# Altium PCB pcb.PcbDoc
Units mm, origin at the board's own origin, x right, y up, seen from the top; angles counter-clockwise.
Board outline 50.5 x 53 mm, 2 copper layers (Top Layer, Bottom Layer); 69 components, 74 nets, 264 pads, 156 vias.
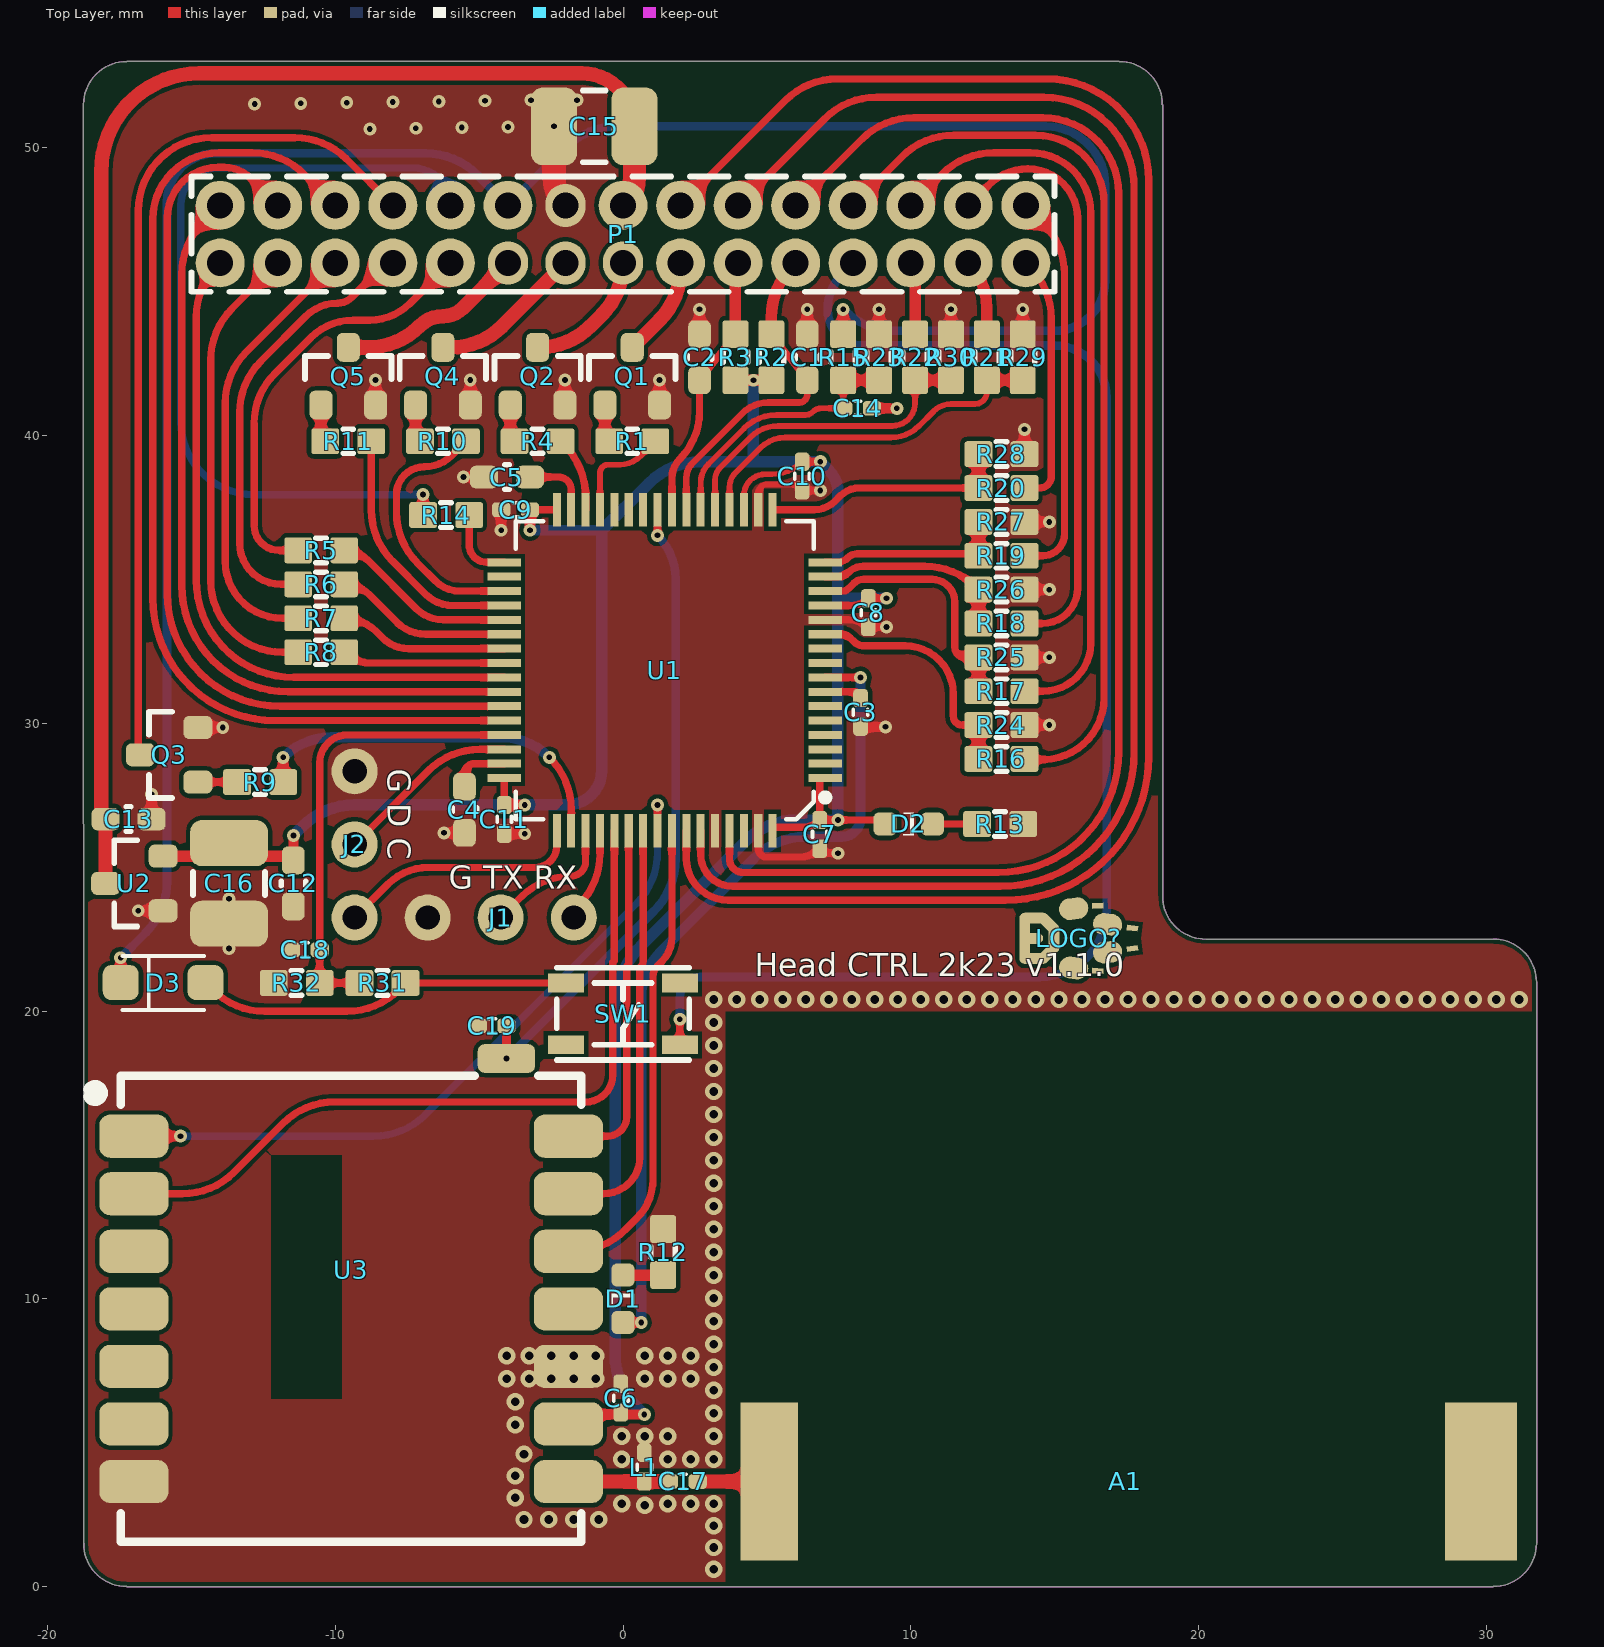
[diagram p0: Top Layer view]
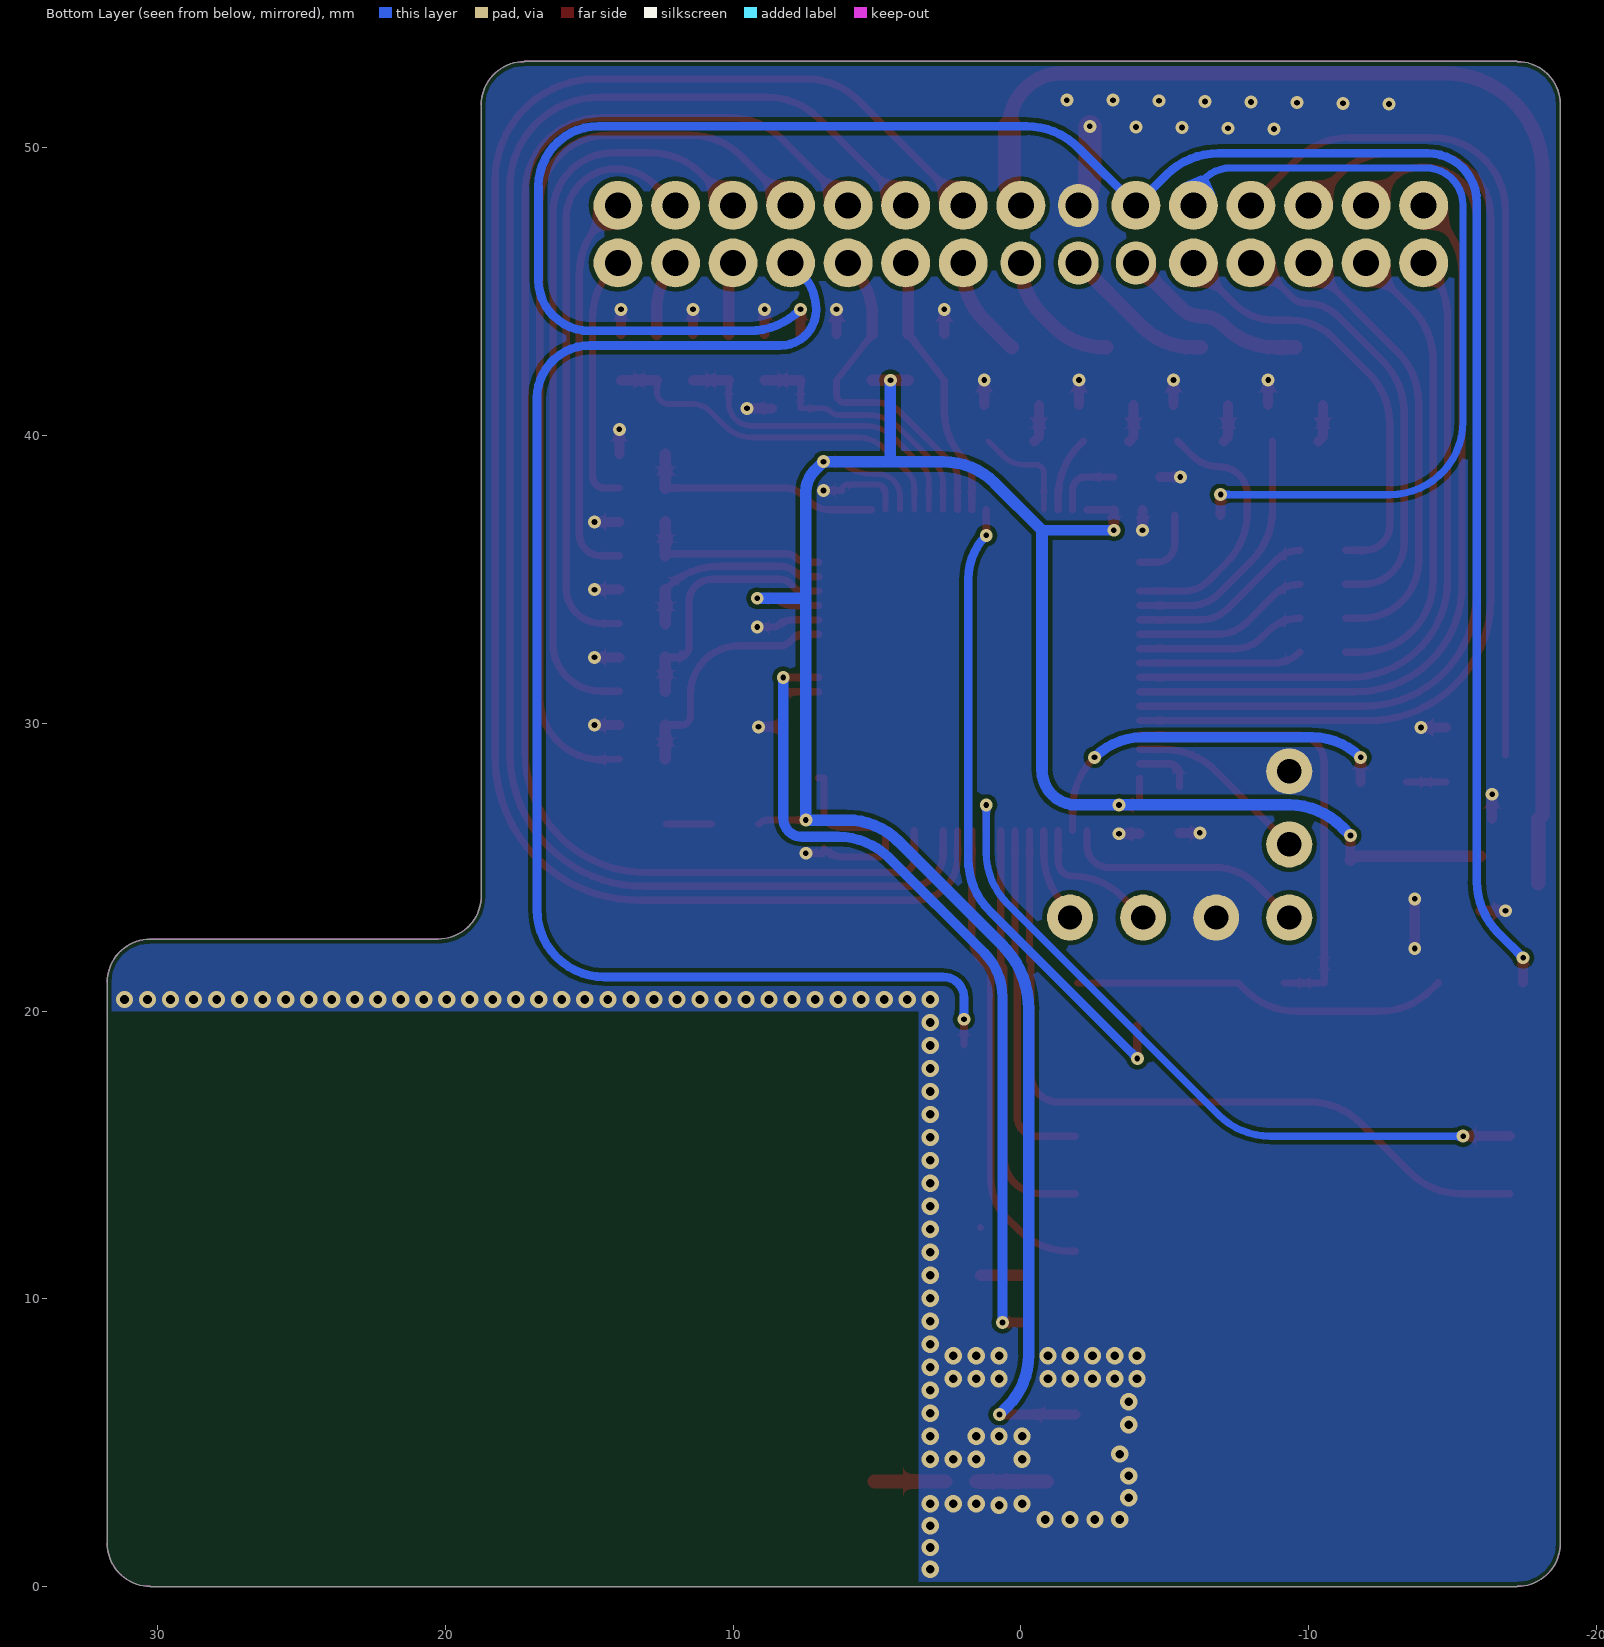
[diagram p1: Bottom Layer view, seen from below]
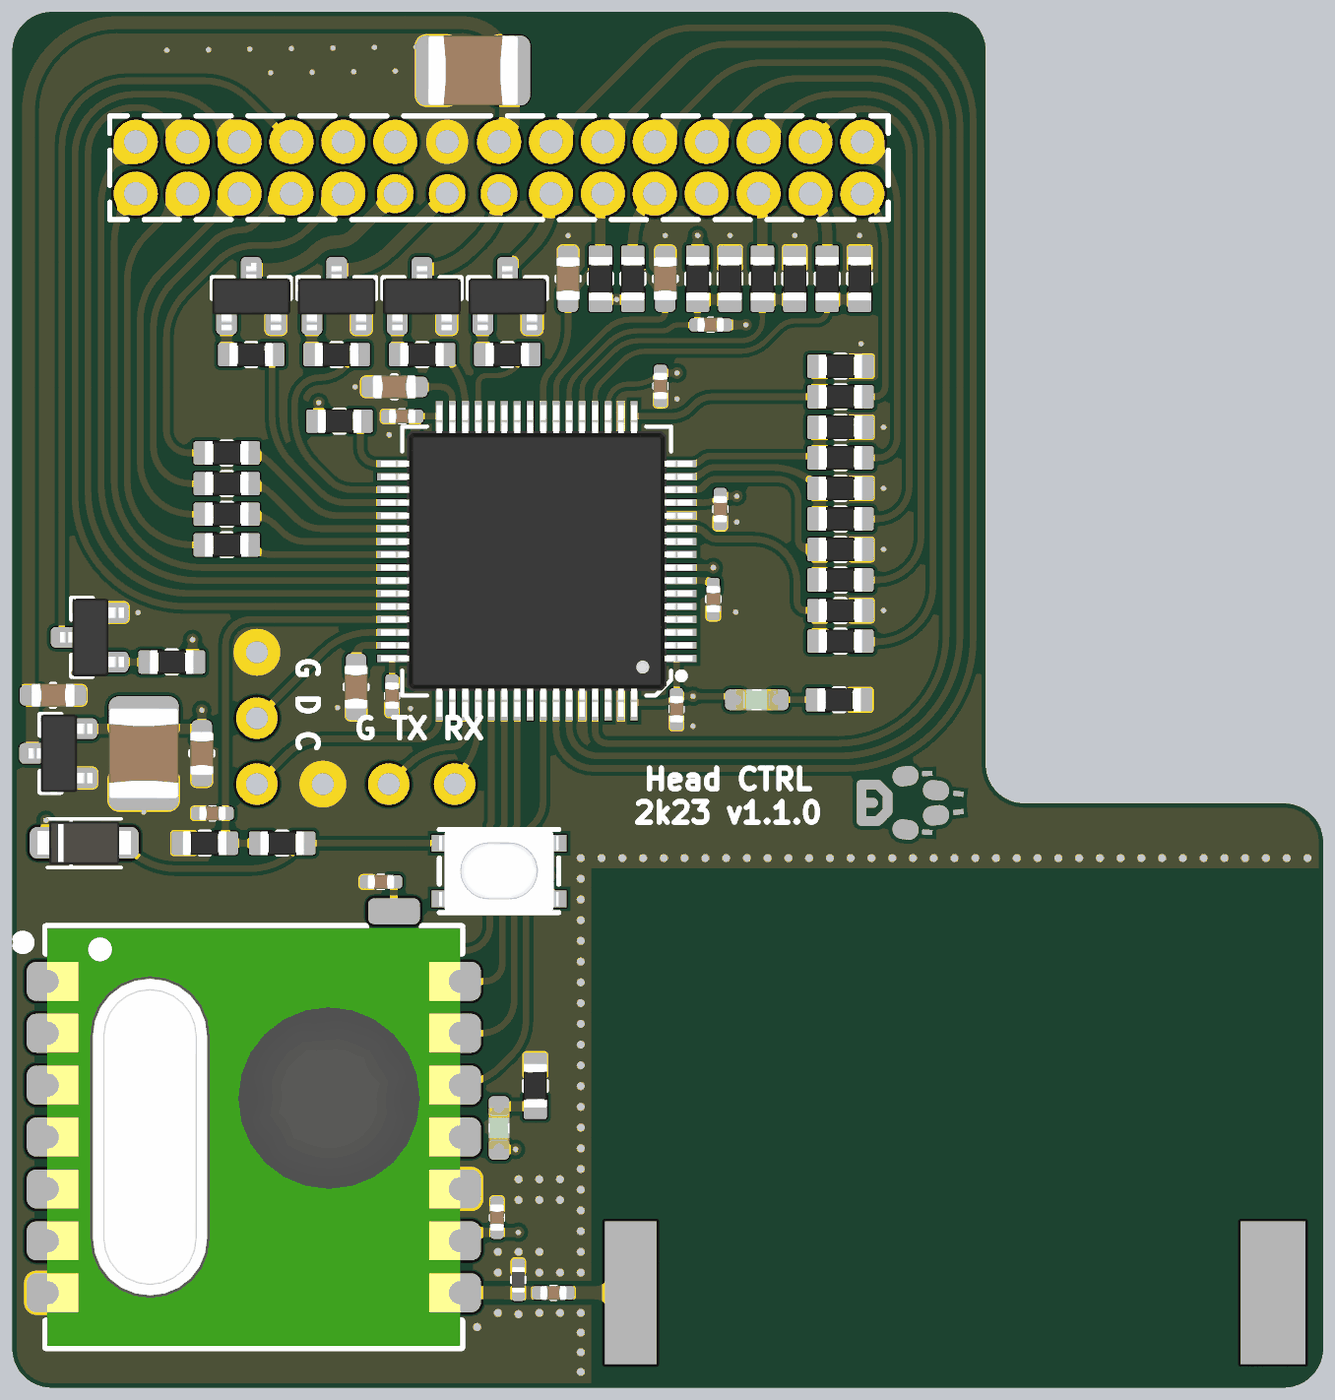
[diagram p2: 3D render of the assembled board from above, using the file's embedded part models]

## Layer stack, top to bottom
Top Solder: solder mask 0.0102, Solder Resist, Dk 3.5
Top Layer: signal copper 0.0356
Dielectric 1: dielectric 0.32, FR-4, Dk 4.8
Bottom Layer: signal copper 0.0356
Bottom Solder: solder mask 0.0102, Solder Resist, Dk 3.5

## Board outline
-18.75,1.5 -18.75,51.499 cw(c-17.25,51.499) -17.25,52.999 -17.25,53 17.25,53 17.25,52.999 cw(c17.25,51.499) 18.75,51.499 18.75,24 ccw(c20.25,24) 20.25,22.5 30.25,22.5 30.25,22.499 cw(c30.25,20.999) 31.75,20.999 31.751,20.999 31.751,1.5 31.75,1.5 cw(c30.25,1.5) 30.25,0.001 30.25,0 -17.25,0 -17.25,0.001 cw(c-17.25,1.5)

## Design rules (kind name [scope] priority, off if disabled: settings)
Clearance Clearance_1 [InNet('ANT')] p1: gap=0.203 ignorepadtopadclearanceinfootprint=FALSE except(0.7: Arc-Fill Arc-Poly Arc-Region Track-Fill Track-Poly Track-Region SMDPad-Fill SMDPad-Poly SMDPad-Region THPad-Fill THPad-Poly THPad-Region Via-Fill Via-Poly Via-Region Fill-Fill Fill-Poly Fill-Region Poly-Poly Poly-Region Region-Region)
Clearance [All] p2: gap=0.15 ignorepadtopadclearanceinfootprint=FALSE
MinimumSolderMaskSliver [All] p1 off: minsoldermaskwidth=0.254
PolygonConnect [All] p1: connectstyle=Direct reliefconductorwidth=0.254 reliefentries=4 polygonreliefangle="90 Angle" airgapwidth=0.254
RoutingVias [All] p1 off: holewidth=0.711 width=1.27 viastyle="Through Hole" minholewidth=0.711 minwidth=1.27 maxholewidth=0.711 maxwidth=1.27
SilkToSolderMaskClearance [IsPad] p1 off: minsilkscreentomaskgap=0.254 clearancetoexposedcopper=TRUE
SolderMaskExpansion [All] p1: expansion=0.102 istentingtop=FALSE
Width [All] p1: maxlimit=12.7 minlimit=0.051 preferedwidth=0.254
28 further rules are at their usual default settings.

## Components (designator, comment, footprint, x,y, rotation, side; value= is the part's Value field where it differs from the comment)
A1 "ANT 433MHZ" 0433AT62A0020 17.45,3.65 r0 top
C1 "100n" C0603 6.404,42.723 r270 top
C2 "100n" C0603 2.66,42.723 r270 top
C3 "100n" C0402 8.255,30.378 r90 top
C4 "2.2u" C0603 -5.51,26.993 r90 top
C5 "2.2u" C0603 -4.034,38.557 r0 top
C6 "100n" C0402 -0.076,6.545 r270 top
C7 "100n" C0402 6.837,26.137 r90 top
C8 "100n" C0402 8.525,33.845 r90 top
C9 "100n" C0402 -3.734,37.42 r0 top
C10 "100n" C0402 6.223,38.591 r90 top
C11 "100n" C0402 -4.125,26.661 r90 top
C12 "1u" C0603 -11.455,24.435 r90 top
C13 "1u" C0603 -17.183,26.67 r180 top
C14 "100n" C0402 8.152,40.945 r180 top
C15 "1u" C1210 -1,50.746 r0 top
C16 "10u" C1210 -13.691,24.435 r90 top
C17 "56pF" C0402 2.096,3.65 r180 top
C18 "100n" C0402 -11.041,22.123 r0 top
C19 "100n" C0402 -4.55,19.482 r0 top
D1 "GRN" LED-0603-GRN 0,10 r270 top
D2 "GRN" LED-0603-GRN 9.931,26.5 r180 top
D3 "DS1M" SOD-123FL -15.983,20.988 r180 top
J1 "UART" HDR-1X3_2.54 -4.25,23.25 r270 top
J2 "SWD" HDR-1X3_2.54 -9.33,25.79 r180 top
L1 "18nH" L0402 0.742,4.15 r90 top
LOGO? "LOGO" LOGO 13.962,22.528 r270 top
P1 "Header 15X2" HDR2X15-2mm 0,47 r180 top
Q1 "IRLML2502" SOT-23 0.321,42.063 r270 top
Q2 "IRLML2502" SOT-23 -2.969,42.063 r270 top
Q3 "IRLML2502" SOT-23 -15.773,28.905 r0 top
Q4 "IRLML2502" SOT-23 -6.258,42.063 r270 top
Q5 "IRLML2502" SOT-23 -9.548,42.063 r270 top
R1 "1k" R0603 0.321,39.802 r0 top
R2 "10k" R0603 5.156,42.723 r270 top
R3 "10k" R0603 3.908,42.723 r270 top
R4 "1k" R0603 -2.969,39.802 r0 top
R5 "10k" R0603 -10.49,36.01 r180 top
R6 "10k" R0603 -10.49,34.83 r180 top
R7 "10k" R0603 -10.49,33.649 r180 top
R8 "10k" R0603 -10.49,32.469 r180 top
R9 "1k" R0603 -12.611,27.955 r0 top
R10 "1k" R0603 -6.258,39.802 r0 top
R11 "1k" R0603 -9.548,39.802 r0 top
R12 "330" R0603 1.396,11.625 r270 top
R13 "1k" R0603 13.106,26.5 r180 top
R14 "1k" R0603 -6.147,37.236 r180 top
R15 "47k" R0603 7.652,42.723 r90 top
R16 "47k" R0603 13.152,28.761 r0 top
R17 "47k" R0603 13.152,31.115 r0 top
R18 "47k" R0603 13.152,33.468 r0 top
R19 "47k" R0603 13.152,35.822 r0 top
R20 "47k" R0603 13.152,38.176 r0 top
R21 "47k" R0603 12.645,42.723 r90 top
R22 "47k" R0603 10.148,42.723 r90 top
R23 "10k" R0603 8.9,42.723 r270 top
R24 "10k" R0603 13.152,29.938 r180 top
R25 "10k" R0603 13.152,32.291 r180 top
R26 "10k" R0603 13.152,34.645 r180 top
R27 "10k" R0603 13.152,36.999 r180 top
R28 "10k" R0603 13.152,39.353 r180 top
R29 "10k" R0603 13.893,42.723 r270 top
R30 "10k" R0603 11.397,42.723 r270 top
R31 "30k" R0603 -8.357,20.975 r0 top
R32 "22k" R0603 -11.341,20.975 r0 top
SW1 "PTS810SJS250" BTN_PTS810 0,19.9 r0 top
U1 "STM32F405RGT6" LQFP-64 1.45,31.845 r90 top
U2 "XC6206P332MR" SOT-23 -16.983,24.435 r0 top
U3 "RFM12B" RFM12B -9.45,9.65 r0 top

## Footprints (in the part's own frame and the unit in brackets; to place one, negate y for a bottom-side part, rotate by r counter-clockwise, add the part's x,y. Pads: shape width x height; smd on the part's side, far side on the other; paste and mask are expansions set on the pad)
0433AT62A0020 [mm]
  rect 2x5.5 smd: 1(-12.375,0)
  rect 2.5x5.5 smd: 2(12.375,0)
  body extent -12.27,-2.5 12.73,2.5, height 1.2
BTN_PTS810 [mm]
  rect 1.25x0.65 smd mask+0.05: 1(-1.975,1.075) 2(1.975,1.075) 3(-1.975,-1.075) 4(1.975,-1.075)
  silkscreen extent -2.3,-1.6 2.3,1.6, body extent -2.3,-1.6 2.3,1.6, height 2.5
C0402 [mm] "Chip Capacitor Body"
  rrect50% 0.635x0.508 smd mask+0.05: 1(-0.5,0) 2(0.5,0)
  silkscreen extent -0.1,-0.25 0.1,0.25, body extent -0.52,-0.27 0.53,0.28, height 0.55
C0603 [mil] "Chip Capacitor"
  rrect50% 38x31 smd mask+1.97: 1(-31.5,0) 2(31.5,0)
  silkscreen extent -3,-17 3,17, body extent -33,-18 33,18, height 35
C1210 [mm] "Chip Capacitor"
  rrect50% 1.6x2.7 smd mask+0.05: 1(-1.4,0) 2(1.4,0)
  silkscreen extent -0.4,-1.25 0.4,1.25, body extent -1.75,-1.35 1.75,1.35, height 1.8
HDR2X15-2mm [mm] "Connector; Header; 30x2 Position"
  round 1.7 hole 0.9: 1(-14,-1) 2(-14,1) 3(-12,-1) 4(-12,1) 5(-10,-1) 6(-10,1) 7(-8,-1) 8(-8,1) 9(-6,-1) 10(-6,1) 11(-4,-1) 12(-4,1) 13(-2,-1) 14(-2,1) 15(0,-1) 19(4,-1) 21(6,-1) 22(6,1) 23(8,-1) 24(8,1) 25(10,-1) 26(10,1) 27(12,-1) 28(12,1) 29(14,-1) 30(14,1)
  oval 1.4x1.5 hole 0.9: 16(0,1) 17(2,-1) 18(2,1) 20(4,1)
  silkscreen extent -15,-2 15,2
HDR-1X3_2.54 [mm]
  round 1.6 hole 0.85: 1(0,2.54) 2(0,0) 3(0,-2.54)
L0402 [mm] "Chip Inductor"
  rrect50% 0.635x0.508 smd mask+0.05: 1(-0.5,0) 2(0.5,0)
  silkscreen extent -0.1,-0.25 0.1,0.25, body extent -0.5,-0.25 0.5,0.25, height 0.5
LED-0603-GRN [mm]
  rrect50% 0.8x0.8 smd mask+0.05: 1(0.825,0) 2(-0.825,0)
  silkscreen extent -0.18,-0.4 0.2,0.4, body extent -0.8,-0.4 0.8,0.4, height 0.6
LOGO [mil]
  rect 15.75x7.87 smd rot 93 mask+4: ""(-44.55,100)
  oval 30x40 smd rot 8 mask+4: ""(-40.55,67)
  oval 15x39.5 smd mask+4: ""(-27.5,12.5) ""(27.5,12.5)
  oval 15x36.21 smd rot 135 mask+4: ""(-20,32.5)
  oval 30x40 smd rot 173 mask+4: ""(-18.99,113.27)
  rect 15.75x7.87 smd rot 83 mask+4: ""(-13.91,147.15)
  oval 39.5x15 smd mask+4: ""(0,40)
  oval 15x32.5 smd mask+4: ""(0,9)
  oval 70x15 smd mask+4: ""(0,0)
  rect 15.75x7.87 smd rot 97 mask+4: ""(13.91,147.15)
  oval 30x40 smd rot 7 mask+4: ""(18.99,113.27)
  oval 15x36.21 smd rot 45 mask+4: ""(20,32.5)
  oval 30x40 smd rot 172 mask+4: ""(40.55,67)
  rect 15.75x7.87 smd rot 87 mask+4: ""(44.55,100)
LQFP-64 [mil]
  rect 11x46 smd mask+0.98: 1(-147.64,-219.5) 2(-127.95,-219.5) 3(-108.27,-219.5) 4(-88.58,-219.5) 5(-68.9,-219.5) 6(-49.21,-219.5) 7(-29.53,-219.5) 8(-9.84,-219.5) 9(9.84,-219.5) 10(29.53,-219.5) 11(49.21,-219.5) 12(68.9,-219.5) 13(88.58,-219.5) 14(108.27,-219.5) 15(127.95,-219.5) 16(147.64,-219.5) 33(147.64,219.5) 34(127.95,219.5) 35(108.27,219.5) 36(88.58,219.5) 37(68.9,219.5) 38(49.21,219.5) 39(29.53,219.5) 40(9.84,219.5) 41(-9.84,219.5) 42(-29.53,219.5) 43(-49.21,219.5) 44(-68.9,219.5) 45(-88.58,219.5) 46(-108.27,219.5) 47(-127.95,219.5) 48(-147.64,219.5)
  rect 46x11 smd mask+0.98: 17(219.5,-147.64) 18(219.5,-127.95) 19(219.5,-108.27) 20(219.5,-88.58) 21(219.5,-68.9) 22(219.5,-49.21) 23(219.5,-29.53) 24(219.5,-9.84) 25(219.5,9.84) 26(219.5,29.53) 27(219.5,49.21) 28(219.5,68.9) 29(219.5,88.58) 30(219.5,108.27) 31(219.5,127.95) 32(219.5,147.64) 49(-219.5,147.64) 50(-219.5,127.95) 51(-219.5,108.27) 52(-219.5,88.58) 53(-219.5,68.9) 54(-219.5,49.21) 55(-219.5,29.53) 56(-219.5,9.84) 57(-219.5,-9.84) 58(-219.5,-29.53) 59(-219.5,-49.21) 60(-219.5,-68.9) 61(-219.5,-88.58) 62(-219.5,-108.27) 63(-219.5,-127.95) 64(-219.5,-147.64)
  silkscreen extent -204,-224 204,204, body extent -236,-236 236,236, height 59
R0603 [mil] "Chip Resistor; Body 1.6 x 0.8 mm (LxW typ)"
  rrect20% 38x35.43 smd mask+1.97: 1(-31.5,0) 2(31.5,0)
  silkscreen extent -7,-17 7,17, body extent -33,-18 33,18, height 22
RFM12B [mm]
  rrect50% 2.4x1.5 smd: 1(-7.55,6) 2(-7.55,4) 3(-7.55,2) 4(-7.55,0) 5(-7.55,-2) 6(-7.55,-4) 7(-7.55,-6) 8(7.55,-6) 9(7.55,-4) 10(7.55,-2) 11(7.55,0) 12(7.55,2) 13(7.55,4) 14(7.55,6)
  rrect50% 2x1 smd: 15(5.4,8.7)
  Top Layer pour cut-out: -2.8,-3.15 -0.3,-3.15 -0.3,5.35 -2.8,5.35
  silkscreen extent -9.05,-8.1 8,8.1, body extent -7.96,-8.05 7.96,8.05, height 4.12
SOD-123FL [mm]
  rrect50% 1.25x1.22 smd: 1(-1.475,0) 2(1.475,0)
  silkscreen extent -1.43,-0.92 1.43,0.95, body extent -1.8,-0.83 1.8,0.82, height 0.95
SOT-23 [mm]
  rrect50% 1x0.8 smd mask+0.05: 1(1,-0.95) 2(1,0.95) 3(-1,0)
  silkscreen extent -0.7,-1.5 0.1,1.5, body extent -1.27,-1.5 1.33,1.5, height 1.1

## Part data
A1: library part Component_2, "433 MHz ISM Antenna", P/N=0433AT62A0020
C1 C2 C3 C4 C5 C6 C7 C8 C9 C10 C11 C12 C13 C14 C15 C16 C18 C19: library part Cap
C17: library part CAP
D1 D2: library part LED-0603-GREEN, "LED 0603 GRN", LCSC part number=C434420, P/N=SZYY0603G
D3: library part US1M-13-F
J1 J2: library part "Header 3"
L1: library part BLM18AG601SN1D, LCSC part number=C92615, P/N=CBG100505U600T
P1: "Header, 15-Pin, Dual row"
Q1 Q2 Q3 Q4 Q5: "MOSFET N-CH 20V 4.2A SOT-23-3"
R1 R2 R3 R4 R5 R6 R7 R8 R9 R10 R11 R12 R13 R14 R15 R16 R17 R18 R19 R20 R21 R22 R23 R24 R25 R26 R27 R28 R29 R30 R31 R32: library part Res1
SW1: library part Component_1, LCSC part number=C221896, P/N=PTS810SJK250SMTRLFS
U1: "MCU STM32F405RGT6", P/N=STM32F405RGT6
U2: library part Component_4_1, LCSC part number=C347376, P/N=XC6206P332MR
U3: library part Component_1_1, P/N=RFM12B

## Via types
v1: diameter 0.6, hole 0.3, Top Layer to Bottom Layer, tented both sides, 95 vias
v2: diameter 0.45, hole 0.2, Top Layer to Bottom Layer, tented both sides, 61 vias

## Nets (pads, with @x,y where several pads share a name; then routed paths per layer and width w, separated by ;. In a path a pad name is that pad's centre, name@x,y a point inside that pad or via, vN(x,y) a via of type N, cw(c..) or ccw(c..) an arc to the next point about the centre after c; other vN are vias at no path point)
3V3: C6.2 C7.2 C8.2 C9.2 C10.2 C11.2 C12.2 C16.2 D2.1 R2.2 R3.2 U1.1 U1.13 U1.19 U1.32 U1.48 U1.64 U2.2 U3.9 | length 97.8
  Top Layer w0.2: U1.19 4.2,37.906 cw(c4.953,37.906) 4.953,38.659 5.181,38.659 ccw(c5.181,40.133) C10.2
  Top Layer w0.25: C11.2 U1.48 ; C9.2 U1.32 ; U1.64@5.2,26.387 6.233,26.387 ccw(c6.233,27.24) C7.2 ; C10.2 v2(6.858,39.091) ; U1.1 6.837,28.095 C7.2 ; U1.13 7.921,34.095 ccw(c7.921,34.948) C8.2 v2(9.16,34.345) ; D2.1 ccw(c8.777,26.17) 8.777,26.637 v2(7.472,26.637) C7.2
  Top Layer w0.35: C12.2 v2(-11.455,26.098) ; C11.2 v2(-3.414,27.161) ; v2(-3.234,36.709) C9.2 ; U3.9@-1.9,5.98 v2(0.742,5.98)
  Top Layer w0.4: U2.2 -11.817,25.385 cw(c-11.817,24.873) C12.2 ; R3.2 v2(4.532,41.923) R2.2
  Bottom Layer w0.35: v2(-3.234,36.709) -0.737,36.709
  Bottom Layer w0.4: v2(-11.455,26.098) -11.137,26.417 cw(c-9.341,24.621) -9.341,27.161 v2(-3.414,27.161) -1.947,27.161 ccw(c-1.947,28.372) -0.737,28.372 -0.737,36.709 0.901,38.347 cw(c2.697,36.551) 2.697,39.091 4.532,39.091 ; v2(0.742,5.98) 0.47,6.252 cw(c2.266,8.048) -0.274,8.048 -0.274,20.07 cw(c2.873,20.07) 0.684,22.332 4.245,25.893 cw(c6.041,24.097) 6.041,26.637 v2(7.472,26.637) 7.472,34.345 ; v2(4.532,41.923) 4.532,39.091 ; v2(9.16,34.345) 7.472,34.345 ; 4.532,39.091 v2(6.858,39.091) 7.165,38.784 cw(c6.424,38.043) 7.472,38.043 7.472,34.345
5V: C13.2 C15.2 P1.15 U2.3 | length 49.7
  Top Layer w0.254: P1.15@0.055,47.526 P1.15@0.055,48
  Top Layer w0.5: U2.3 C13.2 -18.136,26.822 -18.136,49.173 cw(c-14.718,49.173) -14.718,52.59 -1.444,52.59 cw(c-1.444,50.746) C15.2
  Top Layer w0.8: P1.15 ccw(c-0.966,48.966) 0.055,48.058 ccw(c-0.966,48.966) 0.4,48.966 C15.2
_FAN0: P1.18 Q4.3 | length 5.4
  Top Layer w0.5: Q4.3 -5.989,43.063 ccw(c-5.989,45.603) -4.193,43.807 P1.18
_FAN1: P1.20 Q5.3 | length 6.6
  Top Layer w0.5: Q5.3 -8.865,43.063 ccw(c-8.865,45.603) -7.069,43.807 cw(c-6.253,42.991) -6.253,44.145 ccw(c-6.253,45.107) -5.573,44.427 P1.20
_LED0: P1.14 Q1.3 | length 3.5
  Top Layer w0.5: Q1.3 1.256,43.998 ccw(c-0.54,45.794) 2,45.794 P1.14
_LED1: P1.16 Q2.3 | length 4.6
  Top Layer w0.5: Q2.3 -2.921,43.063 ccw(c-2.921,45.603) -1.125,43.807 -0.744,44.189 ccw(c-2.54,45.985) 0,45.985 P1.16
_LED2: P1.23 Q3.3 | length 30.1
  Top Layer w0.254: Q3.3@-16.844,28.905 -16.844,47.815 cw(c-14.304,47.815) -14.304,50.355 -11.407,50.355 cw(c-11.407,47.815) -9.611,49.611 P1.23
_SAIN0: P1.7 R16.2 | length 32.1
  Top Layer w0.254: P1.7 9.694,49.694 cw(c11.491,47.898) 11.491,50.438 14.338,50.438 cw(c14.338,48.057) 16.719,48.057 16.719,30.881 cw(c14.572,30.881) 14.381,28.742 R16.2
_SAIN1: P1.5 R17.2 | length 26.3
  Top Layer w0.254: P1.5 11.085,49.085 cw(c12.881,47.289) 12.881,49.829 14.158,49.829 cw(c14.158,47.727) 16.261,47.727 16.261,32.788 cw(c14.587,32.788) 14.587,31.115 R17.2
_SAIN2: P1.3 R18.2 | length 20.6
  Top Layer w0.254: P1.3 12.703,48.703 cw(c14.071,47.335) 14.071,49.27 cw(c14.071,47.54) 15.802,47.54 15.802,34.7 cw(c14.57,34.7) 14.57,33.468 R18.2
_SAIN3: P1.1 R19.2 | length 13.7
  Top Layer w0.254: R19.2 14.583,35.822 ccw(c14.583,36.581) 15.343,36.581 15.343,45.605 ccw(c12.803,45.605) 14.599,47.401 P1.1
_SAIN4: P1.2 R20.2 | length 8.8
  Top Layer w0.254: R20.2 14.48,38.176 ccw(c14.48,38.58) 14.884,38.58 14.884,44.069 ccw(c12.356,44.069) 14.144,45.856 P1.2
_SAIN5: P1.4 R21.2 | length 3.1
  Top Layer w0.254: P1.4@12,45.516 P1.4
  Top Layer w0.4: P1.4 cw(c10.444,44.444) 12.645,44.444 R21.2
_SAIN6: P1.6 R22.2 | length 2.7
  Top Layer w0.254: P1.6@10,45.853 P1.6
  Top Layer w0.4: P1.6 cw(c9.642,45.642) 10.148,45.642 R22.2
ADC0: R16.1 R24.2 U1.11 | length 8.5
  Top Layer w0.254: U1.11 7.59,33.095 cw(c7.59,32.656) 7.901,32.966 8.033,32.835 ccw(c8.382,33.184) 8.382,32.69 9.804,32.69 cw(c9.804,31.013) 11.481,31.013 11.481,30.251 ccw(c11.795,30.251) 11.795,29.938 R24.2
  Top Layer w0.4: R16.1 R24.2
ADC1: R17.1 R25.2 U1.14 | length 8.9
  Top Layer w0.254: U1.14 7.625,34.595 ccw(c7.625,34.901) 7.841,34.684 8.017,34.861 cw(c8.357,34.522) 8.357,35.001 10.744,35.001 cw(c10.744,34.214) 11.532,34.214 11.532,32.64 ccw(c11.88,32.64) 11.88,32.291 R25.2
  Top Layer w0.4: R17.1 R25.2
ADC2: R18.1 R26.2 U1.15 | length 6.8
  Top Layer w0.254: U1.15 7.461,35.095 ccw(c7.461,35.642) 7.849,35.255 cw(c8.339,34.765) 8.339,35.458 10.487,35.458 cw(c10.487,32.918) 12.283,34.714 R26.2
  Top Layer w0.4: R18.1 R26.2
ADC3: R19.1 R27.2 U1.16 | length 6.6
  Top Layer w0.254: U1.16 7.417,35.595 ccw(c7.417,36.17) 7.823,35.763 cw(c8.13,35.457) 8.13,35.89 R19.1@12.352,35.89
  Top Layer w0.4: R19.1 12.352,35.89 R27.2
ADC4: R20.1 R28.2 U1.17 | length 8.6
  Top Layer w0.254: U1.17 6.644,37.42 ccw(c6.644,38.441) 7.366,37.719 7.553,37.906 cw(c8.204,37.255) 8.204,38.176 R20.1
  Top Layer w0.4: R20.1 R28.2
ADC5: R21.1 R29.2 U1.20 | length 12.8
  Top Layer w0.2: U1.20 3.7,38.199 cw(c4.422,38.199) 3.912,38.71 4.772,39.57 cw(c5.639,38.702) 5.639,39.929 9.306,39.929 ccw(c9.306,41.316) 10.287,40.335 10.798,40.846 cw(c11.405,40.239) 11.405,41.097 12.232,41.097 ccw(c12.232,41.51) 12.645,41.51 R21.1
  Top Layer w0.35: R21.1 R29.2
ADC6: R22.1 R30.2 U1.21 | length 11.3
  Top Layer w0.2: U1.21 3.2,38.457 cw(c3.808,38.457) 3.378,38.887 4.431,39.94 cw(c5.385,38.986) 5.385,40.335 9.355,40.335 ccw(c9.355,41.129) 10.148,41.129 R22.1
  Top Layer w0.35: R22.1 R30.2
ADC7: C14.2 R15.1 R23.2 U1.22 | length 9.3
  Top Layer w0.2: U1.22 2.7,38.358 cw(c3.628,38.358) 2.972,39.014 4.207,40.249 cw(c5.334,39.122) 5.334,40.716 6.331,40.716 ccw(c6.331,41.106) 6.607,40.831 cw(c6.883,40.555) 6.883,40.945 C14.2 R15.1
  Top Layer w0.35: R15.1 R23.2
ADC10: C19.2 U1.25 U3.15 | length 22.7
  Top Layer w0.25: v2(1.2,36.531) U1.25
  Top Layer w0.3: v2(-4.05,18.35) C19.2
  Bottom Layer w0.3: v2(-4.05,18.35) 1.085,23.485 ccw(c-0.711,25.281) 1.829,25.281 1.829,35.013 ccw(c-0.318,35.013) v2(1.2,36.531)
BTN_ON_SNS: C18.2 R31.1 R32.2 U1.45 | length 16
  Top Layer w0.254: R31.1 R32.2 C18.2 -10.541,28.626 cw(c-9.572,28.626) -10.129,29.419 cw(c-9.572,28.626) -9.572,29.595 U1.45
BTN_RTN: D3.2 P1.19 R15.2 | length 78.6
  Top Layer w0.35: D3.2 v2(-17.458,21.851) ; R15.2 v2(7.652,44.386)
  Bottom Layer w0.3: v2(-17.458,21.851) -16.594,22.716 ccw(c-18.39,24.512) -15.85,24.512 -15.85,48.108 cw(c-14.148,48.108) -14.148,49.809 -6.862,49.809 cw(c-6.862,47.269) -5.065,49.065 P1.19 -1.995,50.005 cw(c-0.199,48.209) -0.199,50.749 14.681,50.749 cw(c14.681,48.666) 16.764,48.666 16.764,45.415 cw(c14.986,45.415) 14.986,43.637 9.454,43.637 cw(c9.454,46.177) 7.658,44.381 v2(7.652,44.386)
C\S\: U1.54 U3.14 | length 12.4
  Top Layer w0.254: U3.14 -0.545,15.65 ccw(c-0.545,16.322) 0.127,16.322 0.127,21.508 cw(c0.253,21.508) 0.164,21.597 ccw(c0.076,21.685) 0.2,21.685 U1.54
FAN0: R10.2 U1.35 | length 9.2
  Top Layer w0.254: R10.2 -5.95,39.31 cw(c-6.909,40.269) -6.909,38.913 ccw(c-6.909,37.948) -7.874,37.948 -7.874,37.349 ccw(c-5.334,37.349) -7.13,35.553 -6.528,34.95 ccw(c-5.669,35.809) -5.669,34.595 U1.35
FAN1: R11.2 U1.36 | length 8.8
  Top Layer w0.254: R11.2 -8.748,37.423 ccw(c-6.208,37.423) -8.004,35.627 -6.864,34.487 ccw(c-5.917,35.434) -5.917,34.095 U1.36
GND: C1.1 C2.1 C3.1 C4.1 C5.1 C6.1 C7.1 C8.1 C9.1 C10.1 C11.1 C12.1 C13.1 C14.1 C15.1 C16.1 C18.1 C19.1 J1.3 J2.3 L1.2 P1.17 Q1.2 Q2.2 Q3.2 Q4.2 Q5.2 R12.1 R13.1 R23.1 R24.1 R25.1 R26.1 R27.1 R28.1 R29.1 R30.1 R32.1 U1.12 U1.18 U1.60 U1.63 U2.1 U3.7 U3.10 | length 32.7
  Top Layer w0.2: U1.18 4.7,37.999 cw(c5.004,37.999) 5.004,38.303 6.01,38.303 cw(c6.01,38.091) C10.1
  Top Layer w0.25: U1.63 4.7,25.643 ccw(c4.994,25.643) 4.994,25.349 6.143,25.349 ccw(c6.143,26.33) C7.1 ; C10.1 v2(6.858,38.091) ; C7.1@6.837,25.484 v2(7.472,25.484) ; U1.12 7.921,33.595 cw(c7.921,32.741) C8.1 v2(9.16,33.345)
  Top Layer w0.35: v2(-16.847,23.485) U2.1 ; C13.1 v2(-16.383,27.534) ; Q3.2 v2(-13.91,29.855) ; v2(-13.691,22.171) C16.1 v2(-13.691,23.898) ; Q5.2 v2(-8.598,41.927) ; v2(-6.221,26.193) C4.1 ; v2(-5.545,38.557) C5.1 ; Q4.2 v2(-5.308,41.927) ; v2(-4.234,36.709) C9.1 ; C11.1 v2(-3.414,26.161) ; Q2.2 v2(-2.019,41.927) ; Q1.2 v2(1.271,41.927) ; C2.1 v2(2.66,44.386) ; C1.1 v2(6.404,44.386) ; C3.1 v2(9.119,29.878) ; C14.1 v2(9.516,40.945) ; R23.1 v2(8.9,44.386) ; R30.1 v2(11.397,44.386) ; R29.1 v2(13.893,44.386) ; R24.1 v2(14.816,29.938) ; R25.1 v2(14.816,32.291) ; R26.1 v2(14.816,34.645) ; R27.1 v2(14.816,36.999) ; R28.1 v2(13.953,40.216)
  Top Layer w0.8: v2(-2.4,50.746) -2.4,48.966 ccw(c-1.034,48.966) P1.17
  other v1: 3.15,0.6 3.15,1.358 3.15,2.115 -3.442,2.328 -2.576,2.328 -1.71,2.328 -0.843,2.328 0.754,2.822 -0.045,2.873 1.553,2.873 2.351,2.873 3.15,2.873 -3.747,3.086 -3.747,3.844 -0.045,4.427 1.553,4.427 2.351,4.427 3.15,4.427 -3.442,4.601 -0.045,5.226 0.754,5.226 1.553,5.226 3.15,5.226 -3.747,5.626 3.15,6.024 -3.747,6.424 3.15,6.823 -4.038,7.223 -3.265,7.223 -2.491,7.223 -1.718,7.223 -0.945,7.223 0.754,7.223 1.553,7.223 2.351,7.223 3.15,7.622 -4.038,8.022 -3.265,8.022 -2.491,8.022 -1.718,8.022 -0.945,8.022 0.754,8.022 1.553,8.022 2.351,8.022 3.15,8.42 3.15,9.219 3.15,10.017 3.15,10.816 3.15,11.615 3.15,12.413 3.15,13.212 3.15,14.011 3.15,14.809 3.15,15.608 3.15,16.407 3.15,17.205 3.15,18.004 3.15,18.803 3.15,19.601 3.15,20.4 3.95,20.4 4.75,20.4 5.55,20.4 6.35,20.4 7.15,20.4 7.95,20.4 8.75,20.4 9.55,20.4 10.35,20.4 11.15,20.4 11.95,20.4 12.75,20.4 13.55,20.4 14.35,20.4 15.15,20.4 15.95,20.4 16.75,20.4 17.55,20.4 18.35,20.4 19.15,20.4 19.95,20.4 20.75,20.4 21.55,20.4 22.35,20.4 23.15,20.4 23.95,20.4 24.75,20.4 25.55,20.4 26.35,20.4 27.15,20.4 27.95,20.4 28.75,20.4 29.55,20.4 30.35,20.4 31.15,20.4
  other v2: -8.8,50.657 -7.2,50.679 -5.6,50.702 -4,50.724 -12.8,51.524 -11.2,51.546 -9.6,51.568 -8,51.591 -6.4,51.613 -4.8,51.635 -3.2,51.657 -1.6,51.657
I\R\Q\: U1.53 U3.2 | length 26.8
  Top Layer w0.254: U3.2 -15.317,13.65 ccw(c-15.317,16.19) -13.521,14.394 -11.818,16.096 cw(c-10.022,14.3) -10.022,16.84 -1.295,16.84 ccw(c-1.295,17.78) -0.356,17.78 -0.356,21.692 -0.3,21.747 U1.53
LED0: R1.2 U1.29 | length 3.7
  Top Layer w0.2: U1.29 -0.8,38.697 cw(c-0.508,38.697) -0.508,38.989 -0.1,38.989 ccw(c-0.1,39.975) 0.597,39.278 R1.2
LED1: R4.2 U1.30 | length 2.6
  Top Layer w0.254: R4.2 -2.044,39.677 cw(c-3.84,37.881) -1.3,37.881 U1.30
LED2: R9.2 U1.50 | length 13.2
  Top Layer w0.25: v2(-2.562,28.819) -2.544,28.801 cw(c-4.34,27.005) -1.8,27.005 U1.50
  Top Layer w0.35: R9.2 v2(-11.811,28.819)
  Bottom Layer w0.35: v2(-11.811,28.819) cw(c-10.131,27.139) -10.131,29.515 -4.242,29.515 cw(c-4.242,27.139) v2(-2.562,28.819)
LED_IND: D1.1 U1.8 | length 28.7
  Top Layer w0.254: U1.8 v2(8.255,31.595)
  Top Layer w0.35: D1.1 v2(0.635,9.175)
  Bottom Layer w0.35: v2(0.635,9.175) 0.635,20.475 cw(c2.837,20.475) 1.28,22.032 4.56,25.312 cw(c6.356,23.516) 6.356,26.056 7.607,26.056 ccw(c7.607,26.704) 8.255,26.704 v2(8.255,31.595)
MISO: U1.56 U3.1 | length 25.2
  Top Layer w0.25: U1.56 v2(1.2,27.159)
  Top Layer w0.35: U3.1 v2(-15.374,15.65)
  Bottom Layer w0.25: v2(-15.374,15.65) -8.669,15.65 ccw(c-8.669,18.19) -6.873,16.394 0.456,23.722 ccw(c-1.34,25.519) 1.2,25.519 v2(1.2,27.159)
MOSI: U1.57 U3.12 | length 16.6
  Top Layer w0.254: U3.12 -1.721,11.65 ccw(c-1.721,14.19) 0.075,12.394 0.483,12.802 ccw(c-0.866,14.151) 1.041,14.151 1.041,21.209 cw(c1.532,21.209) 1.185,21.556 1.346,21.717 ccw(c0.492,22.571) 1.7,22.571 U1.57
NetA1_1: A1.1 C17.1 | length 2.5
  Top Layer w0.254: C17.1 C17.1@2.621,3.65
  Top Layer w0.5: C17.1@2.621,3.65 A1.1
NetC4_2: C4.2 U1.47 | length 2
  Top Layer w0.25: C4.2 -5.51,28.254 cw(c-5.169,28.254) -5.169,28.595 U1.47
NetC5_2: C5.2 U1.31 | length 2.4
  Top Layer w0.25: C5.2 -2.235,38.557 cw(c-2.235,38.122) -1.8,38.122 U1.31
NetC17_2: C17.2 L1.1 U3.8 | length 2.5
  Top Layer w0.5: U3.8@-0.908,3.65 C17.2@1.546,3.65
NetD1_2: D1.2 R12.2 | length 1.4
  Top Layer w0.4: D1.2 R12.2
NetD2_2: D2.2 R13.2 | length 1.5
  Top Layer w0.25: D2.2 R13.2
NetD3_1: D3.1 R31.2 SW1.1 | length 13.1
  Top Layer w0.254: D3.1 -14.254,20.734 ccw(c-12.458,22.53) -12.458,19.99 -9.594,19.99 ccw(c-9.594,22.53) -7.798,20.734 R31.2 SW1.1
NetP1_21: P1.21 R14.2 | length 28.9
  Top Layer w0.35: R14.2 v2(-6.947,37.948)
  Bottom Layer w0.254: v2(-6.947,37.948) -12.827,37.948 cw(c-12.827,40.488) -15.367,40.488 -15.367,48.006 cw(c-14.072,48.006) -14.072,49.301 -7.301,49.301 cw(c-7.301,48) P1.21
NetQ1_1: Q1.1 R1.1 | length 1.3
  Top Layer w0.35: Q1.1 -0.629,39.952 R1.1
NetQ2_1: Q2.1 R4.1 | length 1.3
  Top Layer w0.35: Q2.1 -3.919,39.952 R4.1
NetQ3_1: Q3.1 R9.1 | length 1.4
  Top Layer w0.25: Q3.1 R9.1
NetQ4_1: Q4.1 R10.1 | length 1.3
  Top Layer w0.35: Q4.1 -7.208,39.952 R10.1
NetQ5_1: Q5.1 R11.1 | length 1.3
  Top Layer w0.35: Q5.1 -10.498,39.952 R11.1
NetR5_1: R5.1 U1.37 | length 6.5
  Top Layer w0.254: R5.1 cw(c-9.69,34.86) -8.876,35.673 -7.188,33.985 ; -7.188,33.985 ccw(c-6.246,34.928) -6.246,33.595 U1.37
NetR6_1: R6.1 U1.38 | length 6.2
  Top Layer w0.254: R6.1 cw(c-9.69,33.588) -8.812,34.466 ; -8.812,34.466 -7.849,33.503 ccw(c-6.864,34.487) -6.864,33.095 U1.38
NetR7_1: R7.1 U1.39 | length 5.9
  Top Layer w0.254: R7.1 cw(c-9.69,32.071) -8.574,33.187 -8.357,32.969 ccw(c-7.453,33.873) -7.453,32.595 U1.39
NetR8_1: R8.1 U1.40 | length 5.7
  Top Layer w0.254: R8.1 ccw(c-8.788,33.371) -8.788,32.095 U1.40
NetR14_1: R14.1 U1.33 | length 2.6
  Top Layer w0.254: R14.1 -5.347,36.206 ccw(c-4.736,36.206) -4.736,35.595 U1.33
NTC1: C1.2 P1.10 R2.1 U1.23 | length 11.9
  Top Layer w0.229: U1.23 2.2,38.526 cw(c2.927,38.526) 2.413,39.04 4.144,40.771 cw(c5.055,39.86) 5.055,41.148 6.121,41.148 ccw(c6.121,41.431) 6.404,41.431 C1.2 R2.1
  Top Layer w0.4: R2.1 5.156,44.104 cw(c7.696,44.104) 5.9,45.9 P1.10
NTC2: C2.2 P1.12 R3.1 U1.24 | length 9.3
  Top Layer w0.254: U1.24 1.7,38.513 cw(c2.66,38.513) 1.981,39.192 ccw(c0.343,40.83) 2.66,40.83 C2.2 R3.1
  Top Layer w0.4: R3.1 3.908,45.778 cw(c4.222,45.778) P1.12
RST: C3.2 U1.7 | length 1.4
  Top Layer w0.254: U1.7 8.039,31.095 cw(c8.039,30.878) C3.2
RX: J1.1 U1.52 | length 3
  Top Layer w0.25: J1.1@-1.71,23.5 -1.544,23.666 ccw(c-3.34,25.462) -0.8,25.462 U1.52
SCK: U1.55 U3.13 | length 14.6
  Top Layer w0.254: U3.13 -0.681,13.65 ccw(c-0.681,14.915) 0.584,14.915 0.584,21.442 cw(c0.758,21.442) 0.635,21.565 ccw(c0.478,21.722) 0.7,21.722 U1.55
SIN0: P1.22 R5.2 | length 15
  Top Layer w0.254: -12.104,42.151 ccw(c-10.37,40.419) -12.821,40.419 -12.821,36.881 ccw(c-11.95,36.881) -11.95,36.01 R5.2 ; -12.103,42.151 -10.853,43.401 cw(c-9.379,41.928) -9.379,44.012 -8.8,44.012 ccw(c-8.8,45.972) -7.414,44.586 P1.22
SIN1: P1.24 R6.2 | length 15.3
  Top Layer w0.254: R6.2 -11.887,34.83 cw(c-11.887,36.266) -13.324,36.266 -13.324,40.793 cw(c-10.784,40.793) -12.58,42.589 -11.026,44.143 cw(c-9.917,43.034) -9.917,44.602 ccw(c-9.917,45.298) -9.425,44.806 -8.231,46 P1.24
SIN2: P1.26 R7.2 | length 15.5
  Top Layer w0.254: R7.2 -11.836,33.649 cw(c-11.836,35.639) -13.827,35.639 -13.827,41.121 cw(c-11.287,41.121) -13.083,42.917 P1.26
SIN3: P1.28 R8.2 | length 16.4
  Top Layer w0.254: P1.28 -13.586,44.414 ccw(c-11.79,42.618) -14.33,42.618 -14.33,34.962 ccw(c-11.836,34.962) -11.836,32.469 R8.2
SRV0: P1.30 U1.41 | length 23.9
  Top Layer w0.254: P1.30 -14.089,45.911 ccw(c-12.292,44.115) -14.66,45.035 ccw(c-12.292,44.115) -14.832,44.115 -14.832,34.98 ccw(c-11.447,34.98) -11.447,31.595 U1.41
SRV1: P1.29 U1.42 | length 27
  Top Layer w0.254: P1.29 -14.591,47.409 ccw(c-12.795,45.612) -15.335,45.612 -15.335,34.79 ccw(c-11.64,34.79) -11.64,31.095 U1.42
SRV2: P1.27 U1.43 | length 32.3
  Top Layer w0.254: -12.947,48.947 P1.27 ; -12.947,48.947 ccw(c-13.85,48.044) -13.85,49.321 -14.075,49.321 ccw(c-14.075,47.557) -15.838,47.557 -15.838,34.513 ccw(c-11.92,34.513) -11.92,30.595 U1.43
SRV3: P1.25 U1.44 | length 36.1
  Top Layer w0.254: P1.25 -11.085,49.085 ccw(c-12.881,47.289) -12.881,49.829 -14.034,49.829 ccw(c-14.034,47.522) -16.341,47.522 -16.341,34.346 ccw(c-12.09,34.346) -12.09,30.095 U1.44
SRV4: P1.13 U1.58 | length 60.7
  Top Layer w0.254: P1.13 5.65,51.65 cw(c7.446,49.854) 7.446,52.394 14.754,52.394 cw(c14.754,48.879) 18.269,48.879 18.269,28.829 cw(c13.29,28.829) 13.29,23.851 3.658,23.851 cw(c3.658,25.308) 2.2,25.308 U1.58
SRV5: P1.11 U1.59 | length 55.8
  Top Layer w0.254: U1.59 2.7,25.443 ccw(c3.81,25.443) 3.81,24.333 13.11,24.333 ccw(c13.11,28.984) 17.761,28.984 17.761,48.628 ccw(c14.629,48.628) 14.629,51.759 8.811,51.759 ccw(c8.811,49.219) 7.015,51.015 P1.11
SRV6: P1.9 U1.61 | length 50.5
  Top Layer w0.254: U1.61 3.7,25.281 ccw(c4.166,25.281) 4.166,24.816 13.041,24.816 ccw(c13.041,29.002) 17.227,29.002 17.227,48.408 ccw(c14.587,48.408) 14.587,51.048 10.1,51.048 ccw(c10.1,48.508) 8.304,50.304 P1.9
SWCLK: J2.1 U1.49 | length 8.6
  Top Layer w0.254: J2.1 -8.178,24.402 cw(c-6.755,22.98) -6.755,24.991 -3.05,24.991 ccw(c-3.05,25.742) -2.3,25.742 U1.49
SWDIO: J2.2 U1.46 | length 6.5
  Top Layer w0.254: J2.2 -6.769,28.351 cw(c-4.973,26.555) -4.973,29.095 U1.46
TX: J1.2 U1.51 | length 4.8
  Top Layer w0.25: J1.2 -3.524,23.976 cw(c-1.803,22.256) -1.803,24.689 ccw(c-1.803,25.192) -1.3,25.192 U1.51
Vbat: P1.8 SW1.4 | length 49.5
  Top Layer w0.25: SW1.4 v2(1.975,19.714)
  Top Layer w0.254: P1.8@8,45.91 P1.8
  Bottom Layer w0.3: v2(1.975,19.714) 1.975,20.466 cw(c2.692,20.466) 2.692,21.184 14.474,21.184 ccw(c14.474,23.523) 16.813,23.523 16.813,41.303 ccw(c14.987,41.303) 14.987,43.129 8.357,43.129 cw(c8.357,44.374) 7.112,44.374 cw(c8.894,44.374) 7.634,45.634 P1.8
pads on no net: A1.2 LOGO?. SW1.2 SW1.3 U1.2 U1.3 U1.4 U1.5 U1.6 U1.9 U1.10 U1.26 U1.27 U1.28 U1.34 U1.62 U3.3 U3.4 U3.5 U3.6 U3.11

## Polygon pours and split planes (outlines as drawn)
GND on Bottom Layer "Top Layer-GND" (solid, remove dead copper, pour order 3): 31.75,0 -18.75,0 -18.75,53 31.75,53
GND on Top Layer "Top Layer-GND" (solid, remove dead copper, pour order 0): 31.75,0 -18.75,0 -18.75,53 31.75,53

## Keep-outs
Keep-Out Layer:
  the board outline again, w0.001

## Other copper
Top Layer:
  pour cut-out: -1.9,4.112 4.05,4.112 4.05,3.188 -1.9,3.188
Multi-Layer:
  pour cut-out: 3.551,0 3.551,20 31.751,20 31.751,0

## Silkscreen, mask and mechanical layers (free items; w line width, h text height)
Top Overlay:
  text "G D C" at -8.179,28.414 h0.8 r270
  text "G TX RX" at -6.054,24.257 h0.8
  text "Head CTRL 2k23 v1.1.0" at 4.573,21.208 h0.8
Mechanical 3:
  lines w0.001: 3.55,0 3.55,20 31.75,20 31.75,0 ; 4.05,0 4.05,6.4